# Altium PCB Power.PcbDoc
Units mil, origin at the board's own origin, x right, y up, seen from the top; angles counter-clockwise.
Board outline 4985.03 x 2510.03 mil, 2 copper layers (Top Layer, Bottom Layer); 21 components, 0 nets, 53 pads, 18 vias.
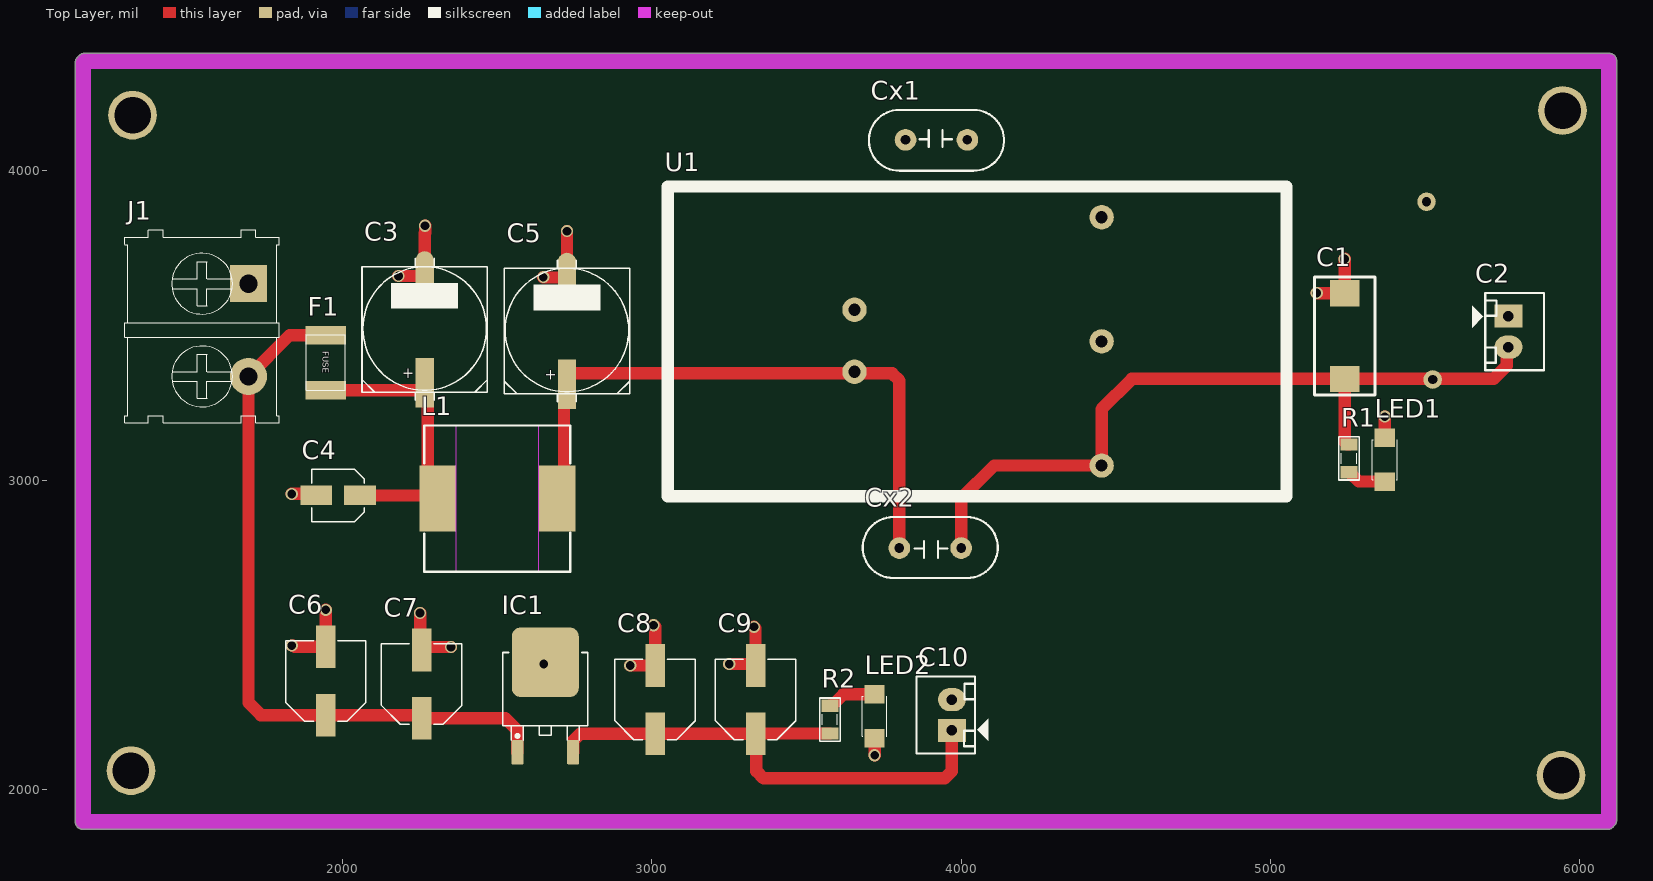
[diagram p0: Top Layer view]
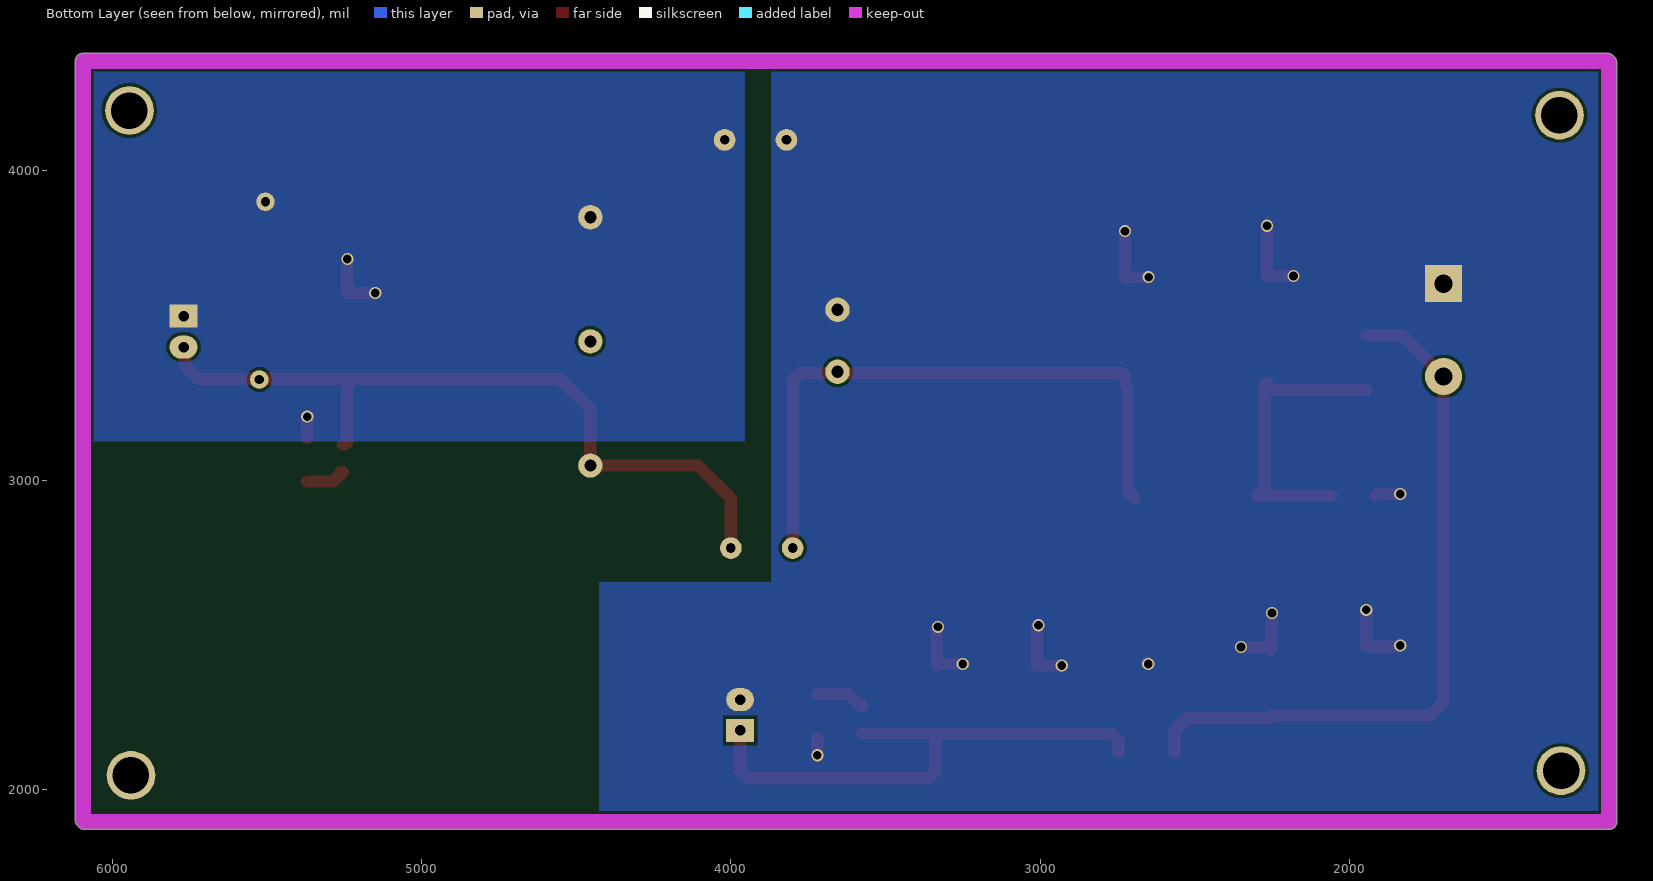
[diagram p1: Bottom Layer view, seen from below]

## Layer stack, top to bottom
Top Solder: solder mask 0.4, Solder Resist, Dk 3.5
Top Layer: signal copper 1.4
Dielectric 1: dielectric 12.6, FR-4, Dk 4.8
Bottom Layer: signal copper 1.4
Bottom Solder: solder mask 0.4, Solder Resist, Dk 3.5

## Board outline
1134.98,1895 1134.98,4350 cw(c1160,4350) 1142.31,4367.69 1147.31,4372.69 cw(c1165,4355) 1165,4380.02 6095,4380.02 cw(c6095,4355) 6120.02,4355 6120.02,1900 cw(c6095,1900) 6112.69,1882.31 6107.69,1877.31 cw(c6090,1895) 6090,1869.98 1160,1869.98 cw(c1160,1895)

## Design rules (kind name [scope] priority, off if disabled: settings)
Clearance [All] p1: gap=10 ignorepadtopadclearanceinfootprint=FALSE except(0: Arc-Hole Track-Hole SMDPad-Hole THPad-Hole Via-Hole Fill-Hole Poly-Hole Region-Hole Text-Hole)
PolygonConnect [All] p1: connectstyle=Relief reliefconductorwidth=10 reliefentries=4 polygonreliefangle="90 Angle" airgapwidth=10
RoutingVias [All] p1: holewidth=28 width=50 viastyle="Through Hole" minholewidth=28 minwidth=50 maxholewidth=28 maxwidth=50
SolderMaskExpansion [All] p1: expansion=4 istentingtop=FALSE
Width [All] p1: maxlimit=10 minlimit=10 preferedwidth=10
30 further rules are at their usual default settings.

## Components (designator, comment, footprint, x,y, rotation, side; value= is the part's Value field where it differs from the comment)
C1 "470uF/10V" TANTALUM-7343 5240,3335 r90 top
C2 "Header2" Header2 5770,3530 r270 top
C3 "330uF/50V" CAP-ALU-SMD-G 2265,3490 r90 top
C4 "1uF/50V" CAP-ALU-SMD-4.5x5x1.4 1985,2950 r180 top
C5 "330uF/50V" CAP-ALU-SMD-G 2725,3485 r90 top
C6 "220uF/50V" CAP-ALU-SMD-6.3x7.7x2.2 1945,2350 r90 top
C7 "220uF/50V" CAP-ALU-SMD-6.3x7.7x2.2 2255,2340 r90 top
C8 "220uF/50V" CAP-ALU-SMD-6.3x7.7x2.2 3010,2290 r90 top
C9 "220uF/50V" CAP-ALU-SMD-6.3x7.7x2.2 3335,2290 r90 top
C10 "Header2" Header2 3970,2190 r90 top
Cx1 "1nF/2kV" CN2-B 3920,4105 r0 top value=33pF
Cx2 "1nF/2kV" CN2-B 3900,2775 r180 top value=33pF
F1 "F3A" "FUSE_SMD 1812" 1947,3382 r270 top value=Fuse
IC1 "LM7805" TO252-123 2655,2265 r0 top
J1 "KF2" KF2-7.62 1545,3485 r270 top
L1 "4.7uH" L-SMD-M-12x10 2500,2940 r90 top
LED1 "LED" LED-1206-Red 5370,2995 r90 top value="LED 3 - 5 ly 2 Colour"
LED2 "LED" LED-1206-Red 3720,2307 r270 top value="LED 3 - 5 ly 2 Colour"
R1 "470" RES-SMD-0805 5255,3070 r270 top
R2 "470" RES-SMD-0805 3575,2225 r90 top
U1 "SLW05B-05" SLW05B-05 3049.21,2939.85 r0 top

## Footprints (in the part's own frame and the unit in brackets; to place one, negate y for a bottom-side part, rotate by r counter-clockwise, add the part's x,y. Pads: shape width x height; smd on the part's side, far side on the other; paste and mask are expansions set on the pad)
CAP-ALU-SMD-4.5x5x1.4 [mm]
  rect 2.6x1.6 smd: 1(-1.8,0) 2(1.8,0)
  silkscreen extent -2.15,-2.15 2.15,2.15, body extent -2.5,-2.15 2.5,2.15, height 5.45
CAP-ALU-SMD-6.3x7.7x2.2 [mm]
  rect 3.5x1.6 smd: 1(-2.8,0) 2(2.8,0)
  silkscreen extent -3.3,-3.3 3.3,3.3, body extent -3.65,-3.3 3.65,3.3, height 7.65
CAP-ALU-SMD-G [mil]
  rect 160x59.06 smd: 1(-175,0)
  oval 160x59.06 smd: 2(170,0)
  silkscreen extent -231,-203 226,203, body extent -233,-203 223,203, height 402
CN2-B [mil]
  round 70 hole 31: 1(-100,-5) 2(100,-5)
  silkscreen extent -218,-105 218,92, body extent -216,-103 216,93, height 492
"FUSE_SMD 1812" [mm]
  rect 1.5x3.3 smd: 1(-2.199,-0.051) 2(2.337,-0.051)
  silkscreen extent -2.25,-1.65 2.34,1.55, body extent -2.22,-1.63 2.28,1.57, height 0.86
Header2 [mil] "CON2"
  rect 75x90 hole 34: 1(0,0)
  oval 75x90 hole 34: 2(100,0)
  silkscreen extent -75,-118 175,115, body extent -68,-70 168,107, height 236
KF2-7.62 [mil]
  rect 120x120 hole 59.06: 1(-150,150)
  round 120 hole 59.06: 2(150,150)
  silkscreen extent -324,-250 300,250, body extent -300,-241 300,231, height 337
L-SMD-M-12x10 [mm] "WE-PDA SMD Shielded Power Inductor, 1210"
  rect 5.4x3 smd: 1(0,4.9) 2(0,-4.9)
  Top Layer keep-out region: -6,-3.4 6,-3.4 6,3.4 -6,3.4
  silkscreen extent -6,-6 6,6, body extent -6,-6 6,6, height 9.7
LED-1206-Red [mil]
  rect 60x65 smd: 1(0,0) 2(142,0)
  silkscreen extent 6,-40 136,40, body extent 7,-31 133,32, height 43
RES-SMD-0805 [mil]
  rect 39.37x55 smd: 1(-45,0) 2(45,0)
  silkscreen extent -70,-34 70,33, body extent -39,-25 39,25, height 31
SLW05B-05 [mm]
  round 2 hole 1: NO(35.687,12.918) V+(35.687,2.718) V-(35.687,23.118) Vin+(15.387,10.418) Vin-(15.387,15.518)
  silkscreen extent 0.05,0.19 50.87,25.64
TANTALUM-7343 [mm]
  rect 2.16x2.41 smd: 1(-0.203,0) 2(6.833,0)
  silkscreen extent -1.52,-2.49 8.15,2.46, body extent -0.5,-2.33 7.1,2.27, height 4
TO252-123 [mm]
  round 0.5 on Mech15: 0(0,0)
  rrect25% 1x2 smd: 1(-2.285,-3.7) 3(2.285,-3.7)
  rrect25% 5.5x5.7 smd: 2(0,3.7)
  silkscreen extent -3.5,-2.7 3.5,4.5, body extent -3.3,-3.95 3.3,5.76, height 2.31

## Part data
C1: library part CN-TANTALUM-SMD
C2 C10: "Header IDC, 2 x 1 Pin Vertical 2.54mm Pitch (Non-Boxed, Male)", Manufacturer="W¨¹rth Elektronik eiSos GmbH", partNo=613002143121, ComponentLink1 Description=Manufacturer, ComponentLink1URL=http://www.we-online.com, ComponentLink2 Description=Datasheet, ComponentLink2URL=http://katalog.we-online.de/em/datasheet/6130xx143121.pdf, Created by="Karrer Zheng", Created Date="29 March 2013", NoPins=02
C3 C4 C5 C6 C7 C8 C9: library part CN-ALU-SMD, "Polarized Capacitor (Axial)", LatestRevisionDate=17-Jul-2002, LatestRevisionNote="Re-released for DXP Platform.", PackageReference=POLAR0.8, Published=8-Jun-2000, Publisher="Altium Limited"
Cx1 Cx2: library part CN
F1: library part Fuse, "Fuse", Designed by=VanDungEvn
IC1: library part LM78xx, "Positive Voltage Regulator", ComponentLink1Description="Manufacturer Link", ComponentLink1URL=http://www.st.com/, ComponentLink2Description=Datasheet, ComponentLink2URL=http://www.st.com/stonline/products/literature/ds/2146/l78m05c.pdf, DatasheetVersion=Apr-1994, LatestRevisionDate=17-Jul-2002, LatestRevisionNote="Re-released for DXP Platform.", Note="Tab is connected to pin 3 (GND).", PackageDescription="TO, Thru-Hole, Vertical, Heatsink Mounted; 3 In-Line Leads; Pitch 2.54 mm; Pin sequence 1, 3, 2", PackageReference=ISOWATT220AB, PackageVersion=Jul-1998, Published=24-Aug-2001, Publisher="Altium Limited"
J1: Manufacturer="Würth Elektronik eiSos GmbH", partNo=691103110002, ComponentLink1 Description=Manufacturer, ComponentLink1URL=http://www.we-online.com, ComponentLink2 Description=Datasheet, ComponentLink2URL=http://katalog.we-online.de/em/datasheet/6911031100xx.pdf, Created by="Karrer Zheng", Created Date="29 October 2013", NoPins=2
L1: library part L-SMD-1, Inductance="1.0 μH", Manufacturer="Wurth Elektronik", partNo=78477010, ComponentLink1Description=Manufacturer, ComponentLink1URL=http://www.we-online.de, ComponentLink2Description=Datasheet, ComponentLink2URL=http://katalog.we-online.de/pbs/datasheet/78477010.pdf, Created by="Baojun Chen", Created Date=Nov.2015
LED1 LED2: library part "LED SMD"
R1 R2: library part Res-SMD, "Resistor", Manufacturer="Generic Components", Class=Passive, Published=08/06/2000, Publisher="Altium Hobart Technology Centre"
U1: library part "Module DC-DC 220/5V/5W"

## Free pads (board coordinates)
  round 157.48 hole 118.11: 4(1315,2060) 4(1320,4180) 4(5940,2045) 4(5945,4195)
  round 60 hole 30: 5(5525,3325) 6(5505,3900)

## Via types
v1: diameter 39.37, hole 28, Top Layer to Bottom Layer, tented both sides, 18 vias

## Nets (pads, with @x,y where several pads share a name; then routed paths per layer and width w, separated by ;. In a path a pad name is that pad's centre, name@x,y a point inside that pad or via, vN(x,y) a via of type N, cw(c..) or ccw(c..) an arc to the next point about the centre after c; other vN are vias at no path point)
pads on no net: C1.1 C1.2 C2.1 C2.2 C3.1 C3.2 C4.1 C4.2 C5.1 C5.2 C6.1 C6.2 C7.1 C7.2 C8.1 C8.2 C9.1 C9.2 C10.1 C10.2 Cx1.1 Cx1.2 Cx2.1 Cx2.2 F1.1 F1.2 IC1.0 IC1.1 IC1.2 IC1.3 J1.1 J1.2 L1.1 L1.2 LED1.1 LED1.2 LED2.1 LED2.2 R1.1 R1.2 R2.1 R2.2 U1.NO U1.V+ U1.V- U1.Vin+ U1.Vin-
copper on no net: | length 11664.9
  Top Layer w40: v1(1835,2465) 1840,2465 1844.76,2460.24 1945,2460.24 v1(1945,2580) ; v1(1835,2955) 1909.13,2955 1914.13,2950 ; 1945,3290 2255.47,3290 2265,3299.53 2265,3315 2274.53,3305.47 2274.53,2972.56 2297.09,2950 2055.87,2950 ; 1945,3468.58 1828.37,3468.58 1695,3335.21 1695,3335 1695,2280 1735.24,2239.76 1945,2239.76 2245,2239.76 2255,2229.76 2525.24,2229.76 2564.72,2190.28 2564.72,2119.65 2565.04,2119.33 ; v1(2180,3660) 2265,3660 2265,3798.7 2266.16,3799.86 v1(2266.16,3822.52) ; v1(2250,2570) 2250,2455.24 2255,2450.24 2264.76,2460 v1(2350,2460) ; v1(2648.75,3656.25) 2650,3655 2725,3655 v1(2725,3805) ; v1(2650,2405) 2655,2410 v1@2655,2410.67 ; 2692.91,2940 2715.47,2962.56 2715.47,3300.47 2725,3310 ; 2725,3320.47 2725,3335.47 2734.53,3345 3650,3345 3655,3350 3660,3345 3776.57,3345 3800,3321.57 3800,2780 ; 2744.96,2119.33 2744.96,2156.33 2768.39,2179.76 3010,2179.76 3335,2179.76 ; v1(2930,2400) 2930.24,2400.24 3010,2400.24 3010,2525 v1(3005,2530) ; v1(3250,2405) 3330.24,2405 3335,2400.24 3335,2520 v1(3330,2525) ; 3575,2180 3335.24,2180 3335,2179.76 ; 3575,2270 3582.19,2270 3619.19,2307 3720,2307 ; v1(3720,2110) 3720,2165 ; 3970,2190 3970,2058.43 3946.57,2035 3361.17,2035 3337.74,2058.43 3337.74,2177.02 3335,2179.76 ; 4000,2780 4000,2940 4106.85,3046.85 4454.21,3046.85 4454.21,3229.21 4552,3327 5240,3327 ; v1(5150,3605) 5151,3604 5240,3604 v1(5240,3715) ; 5255,3025 5262.19,3025 5262.5,3024.69 5262.5,3018.43 5285.93,2995 5370,2995 ; 5255,3115 5247.81,3115 5240,3122.82 5240,3327 ; 5370,3137 v1(5370,3205) ; 5770,3430 5764.81,3424.81 5764.81,3369.81 5722,3327 5240,3327

## Polygon pours and split planes (outlines as drawn)
no net on Bottom Layer "NONET_L02_P001" (solid, pour order 1): 3955,4325 3955,3125 6070,3125 6070,4330
no net on Bottom Layer "NONET_L02_P000" (solid, pour order 0): 1185,4330 3870,4330 3870,2670 4425,2670 4425,1920 1190,1920

## Keep-outs
Keep-Out Layer:
  lines w50: 1160,1895 6090,1895 6095,1900 6095,4355 1165,4355 1160,4350 1160,1895

## Text inside footprints (layer, text, board x,y; h text height)
C3: Top Overlay "+" at 2226.61,3324.65 h35 r90
C5: Top Overlay "+" at 2686.61,3319.65 h35 r90
F1: Top Overlay "FUSE" at 1936,3416 h20 r270